# EAGLE board v6.0.7 Exposta (EAGLE 9.6.2)
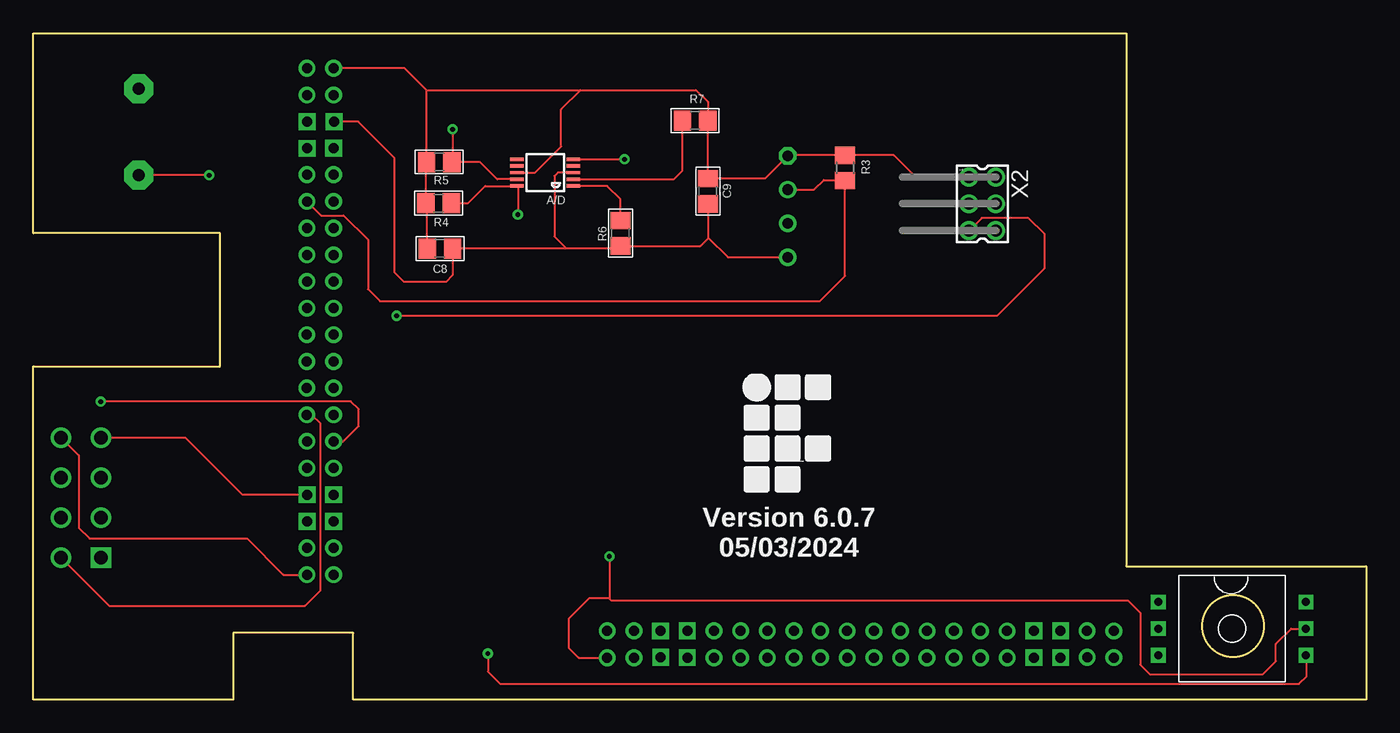
[diagram p0: board, top side]
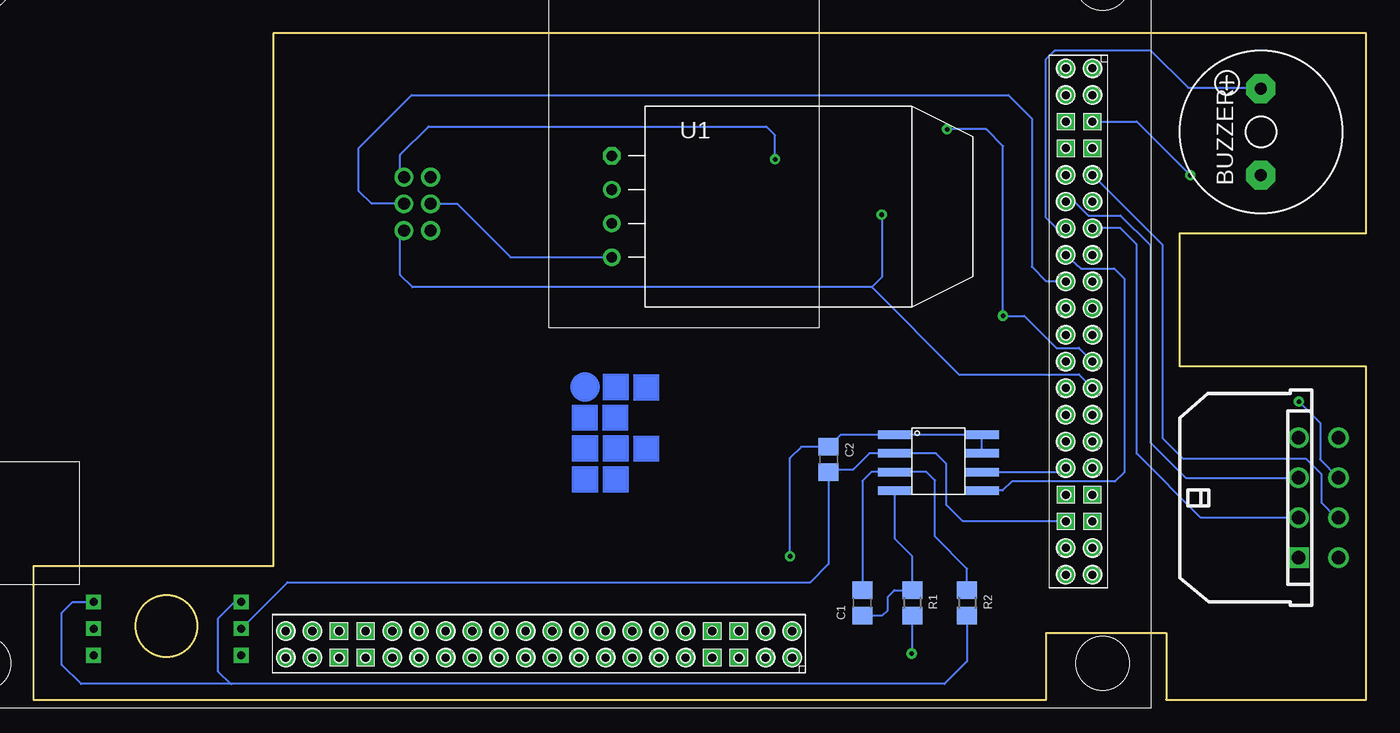
[diagram p1: board, bottom side, seen from below]

Size 100 x 50 mm. Coordinates in mm from the lower left corner, seen from the top.
Outline: 0,0 0,25 14,25 14,35 0,35 0,50 82,50 82,10 100,10 100,0 24,0 24,5 15,5 15,0 0,0
Outline: circle at 90,5.5 radius 2.3
Copper layers (1*16): Top 0.035mm / dielectric 1.5mm / Bottom 0.035mm
Design rules "default": minimum track width 6mil, minimum drill 0.35mm, track to track 6mil, track to pad 6mil, pad to pad 6mil, via to via 6mil, smd to smd 6mil, copper to edge 40mil, drill to drill 6mil, minimum pad ring 10mil, minimum via ring 8mil, stop-mask expansion 4mil, vias tented up to drill 0mil, thermal gap 10mil

## Footprints (pad centres in the part's own frame; a part is rotated, then mirrored left to right if it is on the bottom)
MSOP10 = smd 0.25 x 1: 1 -1,-2.113; 2 -0.5,-2.113; 3 0,-2.113; 4 0.5,-2.113; 5 1,-2.113; 6 1,2.113; 7 0.5,2.113; 8 0,2.113; 9 -0.5,2.113; 10 -1,2.113
F/QMX = drill 0.914 pad 2.159 octagon: + 3.251,0; - -3.251,0
C0805 = smd 1.3 x 1.5: 1 -0.95,0; 2 0.95,0
0805 = smd 1.3 x 1.5: 1 -0.95,0; 2 0.95,0
43045-0800 = drill 1.02 square: P$1 4.5,4.32 | drill 1.02: P$2 1.5,4.32; P$3 -1.5,4.32; P$4 -4.5,4.32; P$5 4.5,7.32; P$6 1.5,7.32; P$7 -1.5,7.32; P$8 -4.5,7.32
R0805 = smd 1.3 x 1.5: 1 -0.95,0; 2 0.95,0
RHT03_DHT-22/RA = drill 0.8: DATA -1.27,0; GND 3.81,0; NULL 1.27,0 | drill 0.8 octagon: VDD -3.81,0
WT32 = drill 0.75: 3V3 -34.46,-21.65; 3V3_2 -34.47,-23.64; 3V3_3 -0.47,-21.65; 3V3_4 -0.47,-23.66; 3V3_5 22.06,-15.42; 3V3_6 24.07,-15.42; 3V3_7 22.06,18.57; 3V3_8 24.07,18.57; 5V -36.47,-21.66; 5V_2 -36.46,-23.65; 5V_3 1.54,-21.65; 5V_4 1.54,-23.66; 5V_5 22.06,-17.43; 5V_6 24.07,-17.43; 5V_7 22.06,20.58; 5V_8 24.07,20.58; EN -20.46,-21.65; EN_2 22.07,-1.43; IO0 -14.46,-21.65; IO0_2 22.06,4.58; IO2 -26.46,-21.66; IO2_2 22.06,-7.42; IO4 -28.46,-21.66; IO4_2 22.06,-9.43; IO5 -12.46,-21.65; IO5_2 22.06,6.57; IO12 -14.46,-23.65; IO12_2 24.07,4.58; IO13 -22.46,-21.66; IO13_2 22.07,-3.42; IO14 -12.46,-23.66; IO14_2 24.07,6.57; IO15 -24.46,-21.66; IO15_2 22.07,-5.43; IO21 -18.46,-23.65; IO21_2 24.08,0.58; IO22 -18.47,-21.66; IO22_2 22.07,0.58; IO23 -16.46,-21.66; IO23_2 22.06,2.57; IO25 -10.47,-21.65; IO25_2 22.06,8.58; IO26 -8.47,-21.65; IO26_2 22.06,10.58; IO27 -10.47,-23.66; IO27_2 24.07,8.58; IO32 -8.47,-23.66; IO32_2 24.07,10.58; IO33 -6.46,-23.66; IO33_2 24.07,12.59; IO34 -24.47,-23.66; IO34_2 24.08,-5.43; IO35 -6.46,-21.65; IO35_2 22.06,12.59; SCL -22.45,-23.66; SCL_2 24.08,-3.42; SDA -20.47,-23.66; SDA_2 24.08,-1.43; SENSOR_VN -26.47,-23.66; SENSOR_VN_2 24.07,-7.42; SENSOR_VP -28.47,-23.66; SENSOR_VP_2 24.07,-9.43; TXD -16.47,-23.66; TXD_2 24.07,2.57 | drill 0.75 square: GND -32.47,-21.65; GND_2 -30.47,-21.65; GND_3 -32.47,-23.65; GND_4 -30.47,-23.65; GND_5 -4.47,-21.65; GND_6 -2.46,-21.66; GND_7 22.06,-13.43; GND_8 22.06,-11.43; GND_9 24.05,-13.43; GND_10 24.05,-11.43; GND_11 22.07,14.58; GND_12 22.04,16.57; GND_13 24.06,14.57; GND_14 24.06,16.56; P$7 -4.47,-23.65; P$8 -2.47,-23.64
HX710B_SMD = smd 2.54 x 0.635: AGND -6.27,4.1; AVDD 0.27,5.5; DOUT 0.27,2.7; DVDD 0.27,4.1; INN -6.27,2.7; INP -6.27,1.3; SCK 0.27,1.3; VREF -6.27,5.5
PRESSURE_PTH = drill 0.6 square: 1 -10.54,7; 2 -10.54,5; 3 -10.54,3; 4 0.54,3; 5 0.54,5; 6 0.54,7
332-06 = drill 0.9 pad 1.27: 1 -2,-1; 2 -2,1; 3 0,-1; 4 0,1; 5 2,-1; 6 2,1

## Placement (x,y rotation side)
A/D  ADS1115IDGST  [MSOP10]  38.4,39.55 90 top
BUZZER  F/QMX  [F/QMX]  7.9,42.6 90 bottom
C1  100n  [C0805]  37.81,7.25 90 bottom
C2  100n  [C0805]  40.33,18.02 270 bottom
C8  1µF  [0805]  30.5,33.85 180 top
C9  1µF  [0805]  50.6,38.15 270 top
MICROFIT  [43045-0800]  9.4,15.15 270 bottom
R1  100  [R0805]  34.06,7.25 270 bottom
R2  100  [R0805]  29.94,7.25 270 bottom
R3  10k  [R0805]  60.9,39.9 270 top
R4  10K  [0805]  30.4,37.25 0 top
R5  10K  [0805]  30.45,40.35 0 top
R6  10K  [0805]  44.05,35 270 top
R7  10K  [0805]  49.65,43.45 180 top
U1  [RHT03_DHT-22/RA]  56.6,37 270 bottom
U$1  WT32_SC01  [WT32]  44.6,26.8 0 bottom
U$2  HX710B  [HX710B_SMD]  29.09,14.38 0 bottom
U$3  PRESSUREPRESSURE_PTH  [PRESSURE_PTH]  94.94,0.32 0 top
X2  332-06  [332-06]  71.2,37.2 270 top

## Library data of the parts
A/D = microbuilder; MPN: ADS1115IDGST
BUZZER = buzzer; MPN: CMI-1295-0585T; OC_FARNELL: unknown; OC_NEWARK: unknown
C1 C2 = rcl@1; MPN: C0805C104K8RACAUTO
C8 C9 = microbuilder; MPN: GRM21BR71A105KA01K
MICROFIT = con-molex-micro-fit-3_0 (1); MPN: MOLEX 43045-0800
R1 R2 = rcl; MPN: RA73F2A100RBTDF; SPICEPREFIX: R
R3 = rcl; MPN: RP0805FRE0710KL; SPICEPREFIX: R
R4-R7 = microbuilder; MPN: RP0805FRE0710KL
U1 = RHT03_DHT-22_AM2302; MPN: DHT22; PROD_ID: SEN-10167
U$1 = WT32_SC01; MPN: WT32-SC01 v3.3
U$2 = HX710B; MPN: HX710B
U$3 = PRESSURE; MPN: MPS20N0040D-GDR
X2 = con-garry

## Nets
5V_6: MICROFIT.P$8 U$1.5V_6
A_OUT: A/D.5 X2.2
ADDR: A/D.1 R6.1
ALERT: A/D.2 R7.2
BZ: BUZZER.+ U$1.IO25_2
GND: C2.2 U$1.GND_7 U$2.AGND U$3.2
GND14: BUZZER.- U$1.GND_14
GND_10: MICROFIT.P$4 U$1.GND_10
GND_S: A/D.3 C8.1 C9.2 R6.2 U1.GND U$1.GND_12 X2.3
HEAT: U$1.IO0_2 X2.4
IO2: MICROFIT.P$7 U$1.IO2_2
IO26: MICROFIT.P$3 U$1.IO26_2
IO27: MICROFIT.P$2 U$1.IO27_2
IO32: R3.2 U1.DATA U$1.IO32_2
IO33: MICROFIT.P$6 U$1.IO33_2
IO34: MICROFIT.P$5 U$1.IO34_2
N$1: C1.2 R2.1 U$2.INN
N$2: C1.1 R1.1 U$2.INP
N$5: R1.2 U$3.4
N$7: R2.2 U$3.1 U$3.6
N$8: MICROFIT.P$1
OUT: U$1.IO4_2 U$2.DOUT
SCK: U$1.IO5_2 U$2.SCK
SCL: A/D.10 R4.2 U$1.SCL_2 X2.6
SDA: A/D.9 R5.2 U$1.SDA_2 X2.5
VCC: C2.1 U$1.5V_4 U$2.AVDD U$2.DVDD U$2.VREF U$3.5
VCC_S: A/D.8 C8.2 C9.1 R3.1 R4.1 R5.1 R7.1 U1.VDD U$1.5V_7 X2.1

## Tracks (layer width: path | path; a pad name or v marks a point on that pad's centre or on a via)
5V_6
  Top 0.152: MICROFIT.P$8 3.41,18.32 3.41,12.89 4.22,12.08 16.04,12.08 18.75,9.37 U$1.5V_6
A_OUT  (via drill 0.35)
  Top 0.152: A/D.5 v44.35,40.55
  Bottom 0.152: v44.35,40.55 44.35,42.35 45,43 70.35,43 72.47,40.88 72.47,39.47 X2.2
ADDR
  Top 0.152: R6.1 44.05,37.55 43.05,38.55 A/D.1
ALERT
  Top 0.152: A/D.2 48.05,39.05 48.7,39.7 R7.2
BZ  (via drill 0.35)
  Top 0.152: v7.96,45.91 BUZZER.+
  Bottom 0.152: 13.05,45.85 13.11,45.91 | U$1.IO25_2 23.24,35.38 24.06,36.2 24.06,48.01 23.38,48.69 16.14,48.69 13.36,45.91 13.11,45.91 | 13.11,45.91 v7.96,45.91
GND
  Bottom 0.152: U$1.GND_7 30.27,13.37 31.5,14.6 31.5,17.7 32.28,18.48 U$2.AGND 37.27,18.48 38.48,17.27 40.13,17.27 C2.2 40.33,10.17 41.7,8.8 80.92,8.8 U$3.2
GND14  (via drill 0.35)
  Top 0.152: v13.2,39.35 BUZZER.-
  Bottom 0.152: v13.2,39.35 17.22,43.37 U$1.GND_14
GND_10
  Top 0.152: U$1.GND_10 15.7,15.37 11.42,19.65 MICROFIT.P$4
GND_S
  Top 0.152: 40,33.85 43.85,33.85 R6.2 50.05,34.05 50.65,34.65 | 40,33.85 C8.1 31.45,31.85 30.95,31.35 27.8,31.35 27.1,32.05 27.1,40.65 24.38,43.37 U$1.GND_12 | A/D.3 39.35,39.55 39.1,39.3 39.1,34.75 40,33.85 | C9.2 50.65,37.2 50.65,34.65 | 50.65,34.65 52.11,33.19 U1.GND
  Bottom 0.152: 70.2,37.15 X2.3 68.2,37.2 64.2,33.2 U1.GND
HEAT
  Bottom 0.152: U$1.IO0_2 23.99,31.38 25.09,32.48 25.09,43.6 26.86,45.37 71.61,45.37 75.58,41.4 75.58,38.17 74.61,37.2 X2.4
IO2  (via drill 0.35)
  Top 0.152: U$1.IO2_2 23.26,19.38 24.41,20.53 24.41,21.79 23.82,22.38 5.07,22.38 v5.05,22.36
  Bottom 0.152: v5.05,22.36 3.45,20.76 3.45,18.02 MICROFIT.P$7
IO26
  Bottom 0.152: U$1.IO26_2 21.9,37.38 20.85,36.33 18.44,36.33 16.21,34.1 16.21,19.31 13.55,16.65 MICROFIT.P$3
IO27
  Bottom 0.152: 20.02,35.39 U$1.IO27_2 18.44,35.38 17.21,34.15 17.21,18.46 12.4,13.65 MICROFIT.P$2
IO32
  Top 0.152: U$1.IO32_2 21.58,36.33 23.28,36.33 25.1,34.51 25.1,30.8 26,29.9 59,29.9 60.9,31.8 R3.2 60.85,39 59.3,39 58.57,38.27 U1.DATA
IO33
  Bottom 0.152: U$1.IO33_2 15.28,34.14 15.28,19.63 13.74,18.09 4.52,18.09 3.36,16.93 3.36,14.78 2.23,13.65 MICROFIT.P$6
IO34
  Top 0.152: MICROFIT.P$5 5.68,7.05 20.39,7.05 21.54,8.2 21.54,20.72 20.89,21.37 U$1.IO34_2
N$1
  Bottom 0.152: C1.2 37.81,16.39 37.12,17.08 U$2.INN 32.98,17.08 32.35,16.45 32.35,12.23 29.94,9.82 R2.1
N$2
  Bottom 0.152: R1.1 34.09,8.23 | R1.1 34.23,8.04 | R1.1 34.06,10.76 35.36,12.06 U$2.INP | C1.1 36.3,6.3 35.9,6.7 35.9,7.7 35.4,8.21 R1.1
N$5  (via drill 0.35)
  Top 0.152: v34.1,3.45 34.1,2.1 35.03,1.17 94.96,1.17 95.53,1.74 95.53,3.27 U$3.4
  Bottom 0.152: R1.2 34.1,6.26 v34.1,3.45
N$7
  Bottom 0.152: R2.2 29.94,2.86 31.63,1.17 85.09,1.17 85.19,1.17 | 85.19,1.17 86.12,2.1 86.12,6.1 84.9,7.32 U$3.1 | 85.19,1.17 96.41,1.17 97.86,2.62 97.86,6.52 97.06,7.32 U$3.6
OUT
  Bottom 0.152: U$2.DOUT 22.84,17.07 U$1.IO4_2
SCK
  Bottom 0.152: U$1.IO5_2 21.39,32.36 18.91,32.36 18.15,31.6 18.15,17.05 18.84,16.36 26.6,16.36 27.28,15.68 U$2.SCK
SCL  (via drill 0.35)
  Top 0.152: R4.2 32.6,37.25 33.9,38.55 A/D.10 36.35,38.49 v36.35,36.4
  Bottom 0.152: v36.35,36.4 36.35,31.7 37.1,30.95 | 37.1,30.95 71.55,30.95 72.47,31.87 72.47,34.93 X2.6 | 37.1,30.95 30.56,24.41 21.55,24.41 U$1.SCL_2
SDA  (via drill 0.35)
  Top 0.152: A/D.9 34.8,39.05 33.5,40.35 31.55,40.35 | 31.55,40.35 R5.2 | v27.25,28.8 72.3,28.8 75.85,32.35 75.85,34.95 74.65,36.15 71.15,36.15 X2.5 | v31.45,42.8 31.45,40.45 31.55,40.35
  Bottom 0.152: U$1.SDA_2 21.54,26.4 23.25,26.4 25.65,28.8 v27.25,28.8 27.25,41.55 28.5,42.8 v31.45,42.8
VCC  (via drill 0.35)
  Top 0.152: U$1.5V_4 40.91,3.14 40.16,3.89 40.16,6.06 41.69,7.59 43.22,7.59 v43.22,10.74 43.22,7.57 43.36,7.43 82.13,7.43 83.05,6.51 83.05,2.61 83.76,1.9 92.25,1.9 93.23,2.88 93.23,4.17 94.38,5.32 U$3.5
  Bottom 0.152: U$2.DVDD U$2.AVDD U$2.VREF | U$2.VREF 39.42,19.88 C2.1 42.38,18.97 43.22,18.13 v43.22,10.74 43.22,10.67 | 37.28,19.88 U$2.VREF
VCC_S
  Top 0.152: R4.1 29.45,37.55 | 29.45,37.55 29.45,40.3 R5.1 29.5,45.75 | U$1.5V_7 27.87,47.38 29.5,45.75 | C8.2 29.55,37.45 29.45,37.55 | A/D.8 37.65,39.55 39.6,41.5 39.6,44.3 41.05,45.75 | 41.05,45.75 49.7,45.75 50.6,44.85 R7.1 C9.1 54.89,39.1 U1.VDD 56.64,40.85 R3.1 64.55,40.85 66.2,39.2 X2.1 70.1,39.1 | 29.5,45.75 41.05,45.75
(copper drawn outside any net)
  shapes: Bottom area x9, Bottom circle x3

## Text on the board
tNames: Version 6.0.7 / 05/03/2024